# Altium PCB RemoteCntrl.PcbDoc
Units mm, origin at the board's own origin, x right, y up, seen from the top; angles counter-clockwise.
Board outline 109.38 x 38.61 mm, 2 copper layers (Top Layer, Bottom Layer); 31 components, 23 nets, 109 pads, 0 vias.
Unrouted connection lines stored in the file: 74.
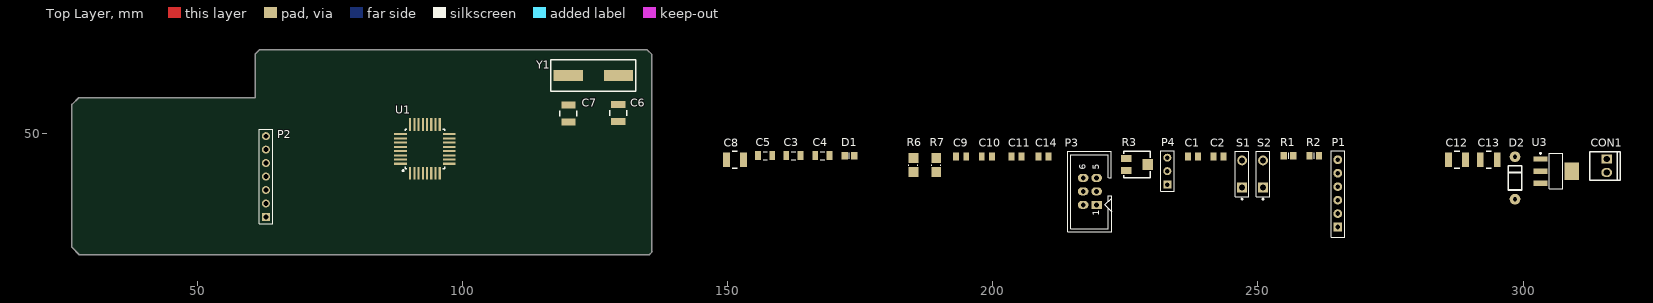
[diagram p0: Top Layer view]
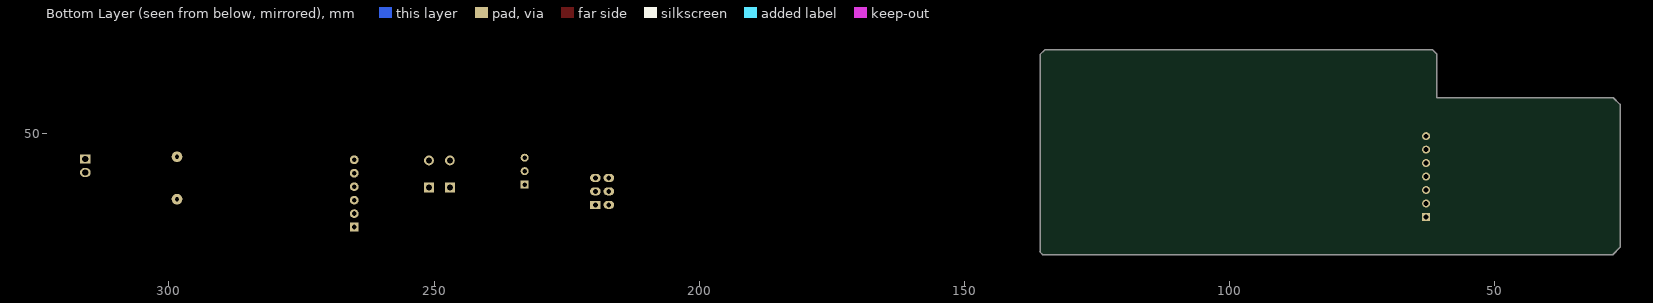
[diagram p1: Bottom Layer view, seen from below]

## Layer stack, top to bottom
Top Solder: solder mask 0.0102, Solder Resist, Dk 3.5
Top Layer: signal copper 0.0356
Dielectric 1: dielectric 0.32, FR-4, Dk 4.8
Bottom Layer: signal copper 0.0356
Bottom Solder: solder mask 0.0102, Solder Resist, Dk 3.5

## Board outline
26.416,28.575 26.416,55.499 27.686,56.769 60.96,56.769 60.96,65.024 61.722,65.786 134.874,65.786 135.763,64.897 135.763,27.718 135.795,27.718 135.572,27.495 135.255,27.178 27.813,27.178

## Design rules (kind name [scope] priority, off if disabled: settings)
Clearance [All] p1: gap=0.254 ignorepadtopadclearanceinfootprint=FALSE except(0: Arc-Hole Track-Hole SMDPad-Hole THPad-Hole Via-Hole Fill-Hole Poly-Hole Region-Hole Text-Hole)
PolygonConnect [All] p1: connectstyle=Relief reliefconductorwidth=0.254 reliefentries=4 polygonreliefangle="90 Angle" airgapwidth=0.254
RoutingVias [All] p1: holewidth=0.711 width=1.27 viastyle="Through Hole" minholewidth=0.711 minwidth=1.27 maxholewidth=0.711 maxwidth=1.27
SolderMaskExpansion [All] p1: expansion=0.102 istentingtop=FALSE
Width [All] p1: maxlimit=0.254 minlimit=0.254 preferedwidth=0.254
30 further rules are at their usual default settings.

## Components (designator, comment, footprint, x,y, rotation, side; value= is the part's Value field where it differs from the comment)
C1 "Capacitor 0805" C0805 237.744,45.72 r0 top
C2 "Capacitor 0805" C0805 242.57,45.72 r0 top
C3 "100n" C1206 162.433,45.847 r0 top value=100nF/100V
C4 "100n" C1206 167.894,45.847 r0 top value=100nF/100V
C5 "100n" C1206 157.099,45.847 r0 top value=100nF/100V
C6 "CCAP1210" C1210 129.413,53.899 r90 top value=18p
C7 "CCAP1210" C1210 120.015,53.772 r90 top value=18p
C8 "100n" C1210 151.384,45.085 r0 top
C9 "1u" C0805 194.056,45.72 r0 top
C10 "1u" C0805 198.882,45.72 r0 top
C11 "1u" C0805 204.47,45.72 r0 top
C12 "1u" C1210 287.528,45.085 r0 top value=2200nF/100V
C13 "4.7u" C1210 293.497,45.085 r0 top value=2200nF/100V
C14 "1u" C0805 209.55,45.72 r0 top
CON1 "Header 2X1" HDR2X1_2P54 315.722,45.212 r0 top
D1 "LED" R0805 172.974,45.847 r0 top
D2 "Diode" DAX4 298.45,41.656 r90 top
P1 "Header 6X1" HDR6X1_2P54 265.049,32.385 r90 top
P2 "Header 7" HDR1X7 62.992,34.29 r90 top
P3 "HDR3X2" HDR2X3_2P54 219.583,36.576 r90 top
P4 "Header 3" HDR1X3 232.918,40.386 r90 top
R1 "Resistor 0805" R0805 255.778,45.847 r0 top
R2 "Resistor 0805" R0805 260.604,45.847 r0 top
R3 "RPot SM" POT4MM-2 227.203,44.196 r0 top
R6 "250R" R1206 185.039,44.069 r90 top
R7 "10k" R1206 189.357,44.069 r90 top
S1 "SW-PB" SPST-2 247.015,42.418 r90 top
S2 "SW-PB" SPST-2 250.952,42.418 r90 top
U1 "ATMega328PB" TQFP32 92.964,47.117 r90 top
U3 "LDL1117S33R" SOT223L 306.197,42.926 r0 top value=3.3V/1.2A
Y1 "SMT-XTAL 16MHz" HC49-US 124.714,60.96 r180 top

## Footprints (in the part's own frame and the unit in brackets; to place one, negate y for a bottom-side part, rotate by r counter-clockwise, add the part's x,y. Pads: shape width x height; smd on the part's side, far side on the other; paste and mask are expansions set on the pad)
C0805 [mm]
  rect 1.1x1.5 smd: 1(-0.95,0) 2(0.95,0)
  body extent -1.1,-0.72 1.1,0.72, height 1.1
C1206 [mm] "Chip Capacitor, Body 3.2x1.6mm, IPC High Density"
  rect 1.1x1.7 smd: 1(-1.35,0) 2(1.35,0)
  silkscreen extent -0.4,-0.75 0.4,0.75, body extent -1.6,-0.8 1.6,0.8, height 1.5
C1210 [mm]
  rect 1.3x2.7 smd: 1(-1.6,0) 2(1.6,0)
  silkscreen extent -0.5,-1.6 0.5,1.6, body extent -1.8,-1.4 1.8,1.4, height 1.24
DAX4 [mm]
  round 2.007 hole 0.8: 1(-4,0) 2(4,0)
  silkscreen extent -2.29,-1.27 2.29,1.27
HC49-US [mm] "20Mhz Crystal"
  rect 5.5x2 smd: 1(-4.75,0) 2(4.75,0)
  silkscreen extent -8,-3 8,3, body extent -4.77,-2.4 4.79,2.4, height 3.8
HDR1X3 [mm] "Connector; Header; 3 Position"
  rect 1.5x1.5 hole 0.9: 1(0,0)
  round 1.5 hole 0.9: 2(2.54,0) 3(5.08,0)
  silkscreen extent -1.27,-1.27 6.35,1.27
HDR1X7 [mm] "Connector; Header; 7 Position"
  rect 1.5x1.5 hole 0.9: 1(0,0)
  round 1.5 hole 0.9: 2(2.54,0) 3(5.08,0) 4(7.62,0) 5(10.16,0) 6(12.7,0) 7(15.24,0)
  silkscreen extent -1.27,-1.27 16.51,1.27
HDR2X1_2P54 [mm] "Polarised Header 2 way"
  rect 2x1.7 hole 1.2: 1(0,0)
  oval 2x1.7 hole 1.2: 2(0,-2.54)
  silkscreen extent -3.16,-3.96 2.54,1.42, body extent -3.3,-3.64 3.17,1.44, height 7.39
HDR2X3_2P54 [mm] "IDC 3X2 Way 2.54 pitch"
  rect 1.5x2 hole 0.9: 1(0,0)
  oval 1.5x2 hole 0.9 paste+0: 2(0,2.54)
  oval 1.5x2 hole 0.9: 3(2.54,0) 4(2.54,2.54) 5(5.08,0) 6(5.08,2.54)
  silkscreen extent -5.1,-2.82 10.1,5.45, body extent -5.07,-3.17 10.17,6.28, height 9.1
HDR6X1_2P54 [mil] "Connector for BLE"
  rect 65x65 hole 35.43: 1(0,0)
  round 65 hole 35.43: 2(100,0) 3(200,0) 4(300,0) 5(400,0) 6(500,0)
  silkscreen extent -75,-50 565,50, body extent -55,-50 545,50, height 334
POT4MM-2 [mm] "Square Trimming Potentiometer"
  rect 2x1.3 smd: CCW(-2,-1.15) CW(-2,1.15)
  rect 2x2 smd: W(2,0)
  silkscreen extent -2.5,-2.5 2.5,2.5
R0805 [mm]
  rect 1.2x1.4 smd: 1(-0.9,0) 2(0.9,0)
  silkscreen extent 0,-0.6 0,0.6, body extent -1.07,-0.7 1.07,0.7, height 0.65
R1206 [mm] "Chip Resistor, 2-Leads, Body 3.20x1.60mm, IPC Low Density"
  rect 1.85x1.85 smd: 1(-1.325,0) 2(1.325,0)
  silkscreen extent -0.1,-0.82 0.1,0.82, body extent -1.7,-0.87 1.7,0.87, height 0.65
SOT223L [mm] "SOT223/SC73, 4-Leads, Body 6.5x3.5mm, Pitch 2.3mm, Lead Span 7mm, IPC Low Density"
  rect 2.7x1 smd: 1(-2.95,2.3) 2(-2.95,0) 3(-2.95,-2.3)
  rect 2.7x3.3 smd: 2(2.95,0)
  silkscreen extent -3.07,-3.35 1.3,3.47, body extent -3.65,-3.35 3.65,3.35, height 1.83
SPST-2 [mm] "Switch; 2 Leads"
  rect 1.85x1.85 hole 1.1: 1(-2.54,0)
  round 1.85 hole 1.1: 2(2.54,0)
  silkscreen extent -4.89,-1.27 4.28,1.27
TQFP32 [mm]
  rect 2.4x0.4 smd: 1(-4.6,2.8) 2(-4.6,2) 3(-4.6,1.2) 4(-4.6,0.4) 5(-4.6,-0.4) 6(-4.6,-1.2) 7(-4.6,-2) 8(-4.6,-2.8) 17(4.6,-2.8) 18(4.6,-2) 19(4.6,-1.2) 20(4.6,-0.4) 21(4.6,0.4) 22(4.6,1.2) 23(4.6,2) 24(4.6,2.8)
  rect 0.4x2.4 smd: 9(-2.8,-4.6) 10(-2,-4.6) 11(-1.2,-4.6) 12(-0.4,-4.6) 13(0.4,-4.6) 14(1.2,-4.6) 15(2,-4.6) 16(2.8,-4.6) 25(2.8,4.6) 26(2,4.6) 27(1.2,4.6) 28(0.4,4.6) 29(-0.4,4.6) 30(-1.2,4.6) 31(-2,4.6) 32(-2.8,4.6)
  silkscreen extent -4.24,-3.7 3.7,4.24, body extent -3.5,-3.5 3.5,3.5, height 1.3

## Part data
C1 C2 C9 C10 C11 C14: library part CCAP0805, "CCAP0805"
C3 C4 C5: library part "Cap CER Decoup C3216C0G2A104J160AC", "CAP CER 0.1UF 100V C0G 1206", Manufacturer="TDK Corporation", MPN=C3216C0G2A104J160AC, Supplier Part Number 1=1795799, Part Description="CAP CER 0.1UF 100V C0G 1206", Supplier 1=RSComponents, Supplier 2=Element14, Supplier 3=Digi-Key, Supplier 4=Mouser, Supplier Part Number 2=2906828, Supplier Part Number 3=445-172677-1-ND, Supplier Part Number 4=810-C3216C0G2A104J6C, Type="Surface mount"
C6 C7: MPN=?, Part Description=?, Type="Surface Mount"
C8: library part CCAP1210, "CCAP1210"
C12 C13: library part "Cap CER HF DC-Link CL32B225KCJSNNE", "CAP CER 2.2UF 100V X7R 1210", Manufacturer="AVX Corporation", MPN=CL32B225KCJSNNE, Supplier Part Number 1=1276-3362-1-ND, Part Description="CAP CER 2.2UF 100V X7R 1210", Supplier 1=Digi-Key, Supplier 2=Arrow, Type="Surface mount"
CON1: library part HDR2X1
P1: library part HDR6X1, "Header, 6-Pin", LatestRevisionDate=17-Jul-2002, LatestRevisionNote="Re-released for DXP Platform.", Publisher="Altium Limited"
P2: "Header, 7-Pin", LatestRevisionDate=17-Jul-2002, LatestRevisionNote="Re-released for DXP Platform.", Publisher="Altium Limited"
P3: "Header, 3-Pin, Dual row"
P4: "Header, 3-Pin", LatestRevisionDate=17-Jul-2002, LatestRevisionNote="Re-released for DXP Platform.", Publisher="Altium Limited"
R1 R2: library part RES0805, "RES0805"
R3: "Square Trimming Potentiometer", ComponentLink1Description="Manufacturer Link", ComponentLink1URL=http://bourns.com/2/search.html, DatasheetVersion=Oct-2003, PackageDescription="Square Trimming Potentiometer", PackageReference=POT4MM-2, Published=17-Dec-2003, Publisher="Altium Limited"
R6 R7: library part RES1206, "RES1206"
S1 S2: "Switch", LatestRevisionDate=17-Jul-2002, LatestRevisionNote="Re-released for DXP Platform.", PackageDescription="Switch; 2 Leads", PackageReference=SPST-2, Published=24-Mar-1999, Publisher="Altium Limited"
U1: "IC MCU 8BIT 32KB FLASH 32TQFP", Supplier Part Number 1=ATMEGA328PB-AU-ND, Supplier 1=Digi-Key, Supplier 2=Digikey, Supplier Part Number 2=ATMEGA328PB-AU-ND
U3: library part "LDO LDL1117S33R", "IC REG LINEAR 3.3V 1.2A SOT223", Manufacturer=STMicroelectronics, Supplier Part Number 1=2729708, MPN=LDL1117S33R, Part Description="IC REG LINEAR 3.3V 1.2A SOT223", Supplier 1=Element14, Supplier 2=Digi-Key, Supplier 3=Mouser, Supplier Part Number 2=497-17239-1-ND, Supplier Part Number 3=511-LDL1117S33R, Type="Surface mount"
Y1: library part TXC9C-16_XTAL_SMT, "9C-16.000MAAJ-T crystal 16.0000MHZ 18PF SMD", Frequency Stability=±30ppm, Load Capacitance=18pF, Manufacturer="TXC CORPORATION", Manufacturer Part Number=9C-16.000MAAJ-T, Operating Mode=Fundamental, Operating Temperature="-20°C ~ 70°C", Package / Case=HC-49/US, Ratings=-, Supplier Part Number 1=887-1059-1-ND, Category="Crystals, Oscillators, Resonators", ComponentLink1Description=http://www.txccorp.com/download/products/quartz_crystals/2015TXC_9C_32.pdf, ComponentLink1URL=http://www.txccorp.com/download/products/quartz_crystals/2015TXC_9C_32.pdf, Frequency Tolerance=±30ppm, Height - Seated (Max)="0.161\" (4.10mm)", Mounting Type="Surface Mount", Packaging="Cut Tape (CT)", Part Status=Active, Pricing 1="1=0.75, 10=0.628, 50=0.5656, 100=0.5026, 500=0.47744 (NZD)", RoHS="RoHS Compliant", Size / Dimension="0.449\" L x 0.189\" W (11.40mm x 4.80mm)", Stock 1=11514, Supplier 1=Digi-Key, Type="MHz Crystal"

## Nets (pads, with @x,y where several pads share a name; then routed paths per layer and width w, separated by ;. In a path a pad name is that pad's centre, name@x,y a point inside that pad or via, vN(x,y) a via of type N, cw(c..) or ccw(c..) an arc to the next point about the centre after c; other vN are vias at no path point)
3V3: C3.2 C4.2 C5.2 C13.2 P2.1 P3.2 P4.1 R1.1 R2.1 R3.CW R6.2 R7.2 U1.4 U1.18 U1.20 U3.2
9V: CON1.2 D2.1
BLE_RESET: P2.7 U1.3
GND: C1.1 C2.1 C3.1 C4.1 C5.1 C6.1 C7.1 C8.1 C9.1 C10.1 C11.1 C12.1 C13.1 C14.1 CON1.1 D1.2 P1.5 P2.2 P3.6 P4.3 R3.CCW S1.2 S2.2 U3.1
HOST_CTS: P2.4 U1.13
HOST_RTS: P2.3 U1.12
HOST_RX: P2.6 U1.30
HOST_TX: P2.5 U1.31
MISO: P3.1 U1.16
MOSI: P3.4 U1.15
NetC12_2: C12.2 D2.2 U3.3
NetD1_1: D1.1 R6.1
RESET: C8.2 P3.5 P4.2 R7.1 U1.29
SCK: P3.3 U1.17
V_ACCEL_1: C9.2 P1.1 U1.10
V_ACCEL_2: C10.2 P1.2 U1.2
V_ACCEL_3: C11.2 P1.3 U1.9
V_ACCEL_4: C14.2 P1.4 U1.11
V_MV_BWD: C2.2 R2.2 S2.1 U1.1
V_MV_FWD: C1.2 R1.2 S1.1 U1.32
V_STR_CTRL: R3.W U1.25
X1: C6.2 U1.7 Y1.1
X2: C7.2 U1.8 Y1.2
pads on no net: P1.6 U1.5 U1.6 U1.14 U1.19 U1.21 U1.22 U1.23 U1.24 U1.26 U1.27 U1.28

## Text inside footprints (layer, text, board x,y; h text height)
P3: Top Overlay "6" at 217.551,43.18 h1.27 r90; Top Overlay "5" at 220.091,43.18 h1.27 r90; Top Overlay "1" at 220.091,34.544 h1.27 r90